# EAGLE board phasedetector (EAGLE 6.6.0)
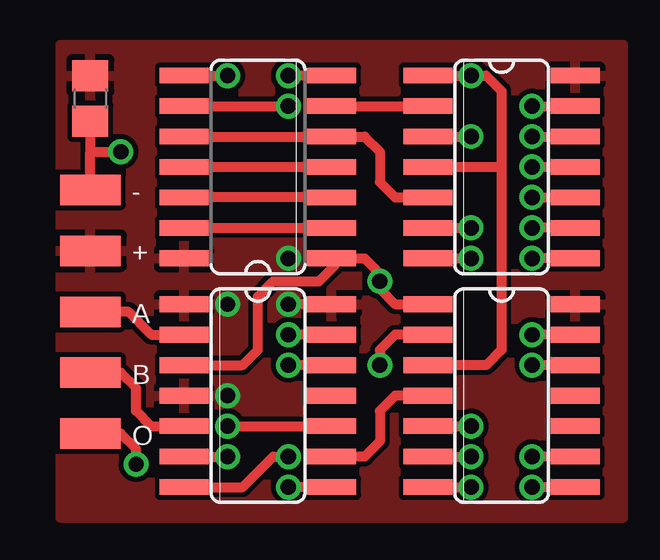
[diagram p0: board, top side]
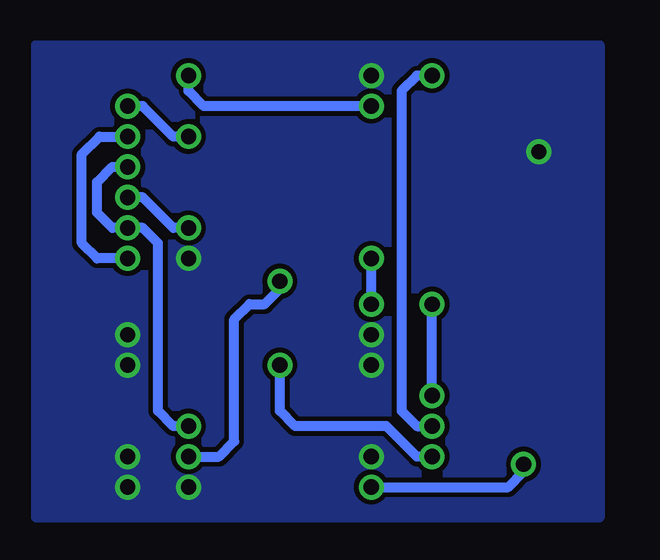
[diagram p1: board, bottom side, seen from below]

No outline drawn. Coordinates in mm, seen from the top.
Copper layers (1*16): Top 0.035mm / dielectric 1.5mm / Bottom 0.035mm
Design rules "default": minimum track width 10mil, minimum drill 24mil, track to track 8mil, track to pad 8mil, pad to pad 8mil, via to via 8mil, smd to smd 8mil, copper to edge 40mil, drill to drill 8mil, minimum pad ring 10mil, minimum via ring 8mil, stop-mask expansion 4mil, vias tented up to drill 0mil, thermal gap 10mil

## Footprints (pad centres in the part's own frame; a part is rotated, then mirrored left to right if it is on the bottom)
SMD1,27-2,54 = smd 1.27 x 2.54: 1 0,0
C0805 = smd 1.3 x 1.5: 1 -0.95,0; 2 0.95,0
SO14 = smd 0.66 x 2.032: 1 -3.81,-3.073; 2 -2.54,-3.073; 3 -1.27,-3.073; 4 0,-3.073; 5 1.27,-3.073; 6 2.54,-3.073; 7 3.81,-3.073; 8 3.81,3.073; 9 2.54,3.073; 10 1.27,3.073; 11 0,3.073; 12 -1.27,3.073; 13 -2.54,3.073; 14 -3.81,3.073

## Placement (x,y rotation side)
+  [SMD1,27-2,54]  1.27,11.11 270 top
-  [SMD1,27-2,54]  1.27,13.65 270 top
A  [SMD1,27-2,54]  1.27,8.57 270 top
B  [SMD1,27-2,54]  1.27,6.03 270 top
C1  1uF  [C0805]  1.27,17.46 270 top
IC1  74266  [SO14]  18.41,5.08 270 top
IC2  7400  [SO14]  18.41,14.61 270 top
IC3  7404  [SO14]  8.26,14.61 90 top
IC4  74126  [SO14]  8.26,5.08 270 top
O  [SMD1,27-2,54]  1.27,3.49 270 top

## Library data of the parts
+ - A B O = wirepad
C1 = rcl
IC1 IC2 IC4 = 74xx-us
IC3 = 74xx-eu

## Nets
GND: -.1 C1.2 IC1.7 IC1.8 IC1.9 IC1.12 IC1.13 IC2.7 IC3.7 IC4.7 IC4.12 IC4.13
N$1: IC1.5 IC2.9 IC2.11
N$2: IC2.8 IC2.12
N$3: IC1.3 IC2.1 IC2.4 IC3.9
N$4: IC2.6 IC2.10
N$5: IC2.3 IC2.13
N$6: IC3.2 IC3.13
N$7: IC3.3 IC3.12
N$8: IC3.4 IC3.11
N$9: IC2.5 IC3.5 IC3.10
N$10: IC2.2 IC3.6
N$11: IC1.4 IC4.9
N$12: IC1.1 IC1.6 IC3.1 IC4.3
N$13: A.1 IC4.2
N$14: IC3.8 IC4.10
N$15: IC4.8 O.1
N$16: B.1 IC4.5
N$17: IC1.2 IC4.6
VCC: +.1 C1.1 IC1.14 IC2.14 IC3.14 IC4.1 IC4.4 IC4.14

## Tracks (layer width: path | path; a pad name or v marks a point on that pad's centre or on a via)
GND  (via drill 0.64)
  Top 0.406: IC3.7 v9.53,18.41 | IC1.8 v19.68,1.27 | IC1.9 v19.68,2.54 | IC1.13 v19.68,7.62 | IC1.12 v19.68,6.35 | IC2.7 v17.14,10.79 | IC4.13 v9.53,7.62 | IC4.12 v9.53,6.35 | IC4.7 7.62,1.27 8.89,2.54 v9.53,2.54 | C1.2 1.27,15.24 | -.1 1.27,15.24 | 1.27,15.24 v2.54,15.24 | IC1.7 v17.14,1.27
  pour Bottom (isolate 0.203): 0,0 23.5,0 23.5,19.68 0,19.68
N$1  (via drill 0.64)
  Top 0.406: IC2.9 v19.68,12.06 | v19.68,14.61 IC2.11 | IC1.5 v17.14,3.81
  Bottom 0.406: v19.68,14.61 20.32,14.61 20.95,13.97 20.95,12.7 20.32,12.06 v19.68,12.06 19.05,12.06 18.41,11.43 18.41,4.45 17.78,3.81 v17.14,3.81
N$2  (via drill 0.64)
  Top 0.406: IC2.8 v19.68,10.79 | v19.68,15.88 IC2.12
  Bottom 0.406: v19.68,10.79 20.95,10.79 21.59,11.43 21.59,15.14 20.85,15.88 v19.68,15.88
N$3  (via drill 0.64)
  Top 0.406: 18.41,14.61 18.41,17.78 17.78,18.41 v17.14,18.41 IC2.1 | IC2.4 18.41,14.61 | 18.41,14.61 18.41,6.99 17.78,6.35 IC1.3 | IC3.9 v9.53,17.14
  Bottom 0.406: v9.53,17.14 16.51,17.14 17.14,17.78 v17.14,18.41
N$4  (via drill 0.64)
  Top 0.406: IC2.6 v17.14,12.06 | v19.68,13.34 IC2.10
  Bottom 0.406: v17.14,12.06 17.78,12.06 19.05,13.34 v19.68,13.34
N$5  (via drill 0.64)
  Top 0.406: IC2.3 v17.14,15.88 | v19.68,17.14 IC2.13
  Bottom 0.406: v17.14,15.88 17.78,15.88 19.05,17.14 v19.68,17.14
N$6
  Top 0.406: IC3.13 IC3.2
N$7
  Top 0.406: IC3.3 IC3.12
N$8
  Top 0.406: IC3.11 IC3.4
N$9
  Top 0.406: IC3.10 IC3.5 12.7,15.88 13.34,15.24 13.34,13.97 13.97,13.34 IC2.5
N$10
  Top 0.406: IC3.6 IC2.2
N$11
  Top 0.406: IC1.4 13.97,5.08 13.34,4.45 13.34,3.17 12.7,2.54 IC4.9
N$12  (via drill 0.64)
  Top 0.406: IC4.3 7.62,6.35 8.26,6.99 8.26,9.21 8.89,9.84 10.79,9.84 11.43,10.48 11.43,10.79 | 11.43,10.79 12.7,10.79 13.34,10.16 v13.34,9.84 13.34,9.53 13.97,8.89 IC1.1 | IC1.6 v17.14,2.54 | IC3.1 11.43,10.79
  Bottom 0.406: v17.14,2.54 15.88,2.54 15.24,3.17 15.24,8.26 14.61,8.89 13.97,8.89 13.34,9.53 v13.34,9.84
N$13
  Top 0.406: IC4.2 3.81,7.62 2.86,8.57 A.1
N$14  (via drill 0.64)
  Top 0.406: IC3.8 v6.99,18.41 | v6.99,3.81 IC4.10
  Bottom 0.406: v6.99,18.41 7.62,18.41 8.26,17.78 8.26,4.45 7.62,3.81 v6.99,3.81
N$15  (via drill 0.64)
  Top 0.406: IC4.8 v9.53,1.27 | v3.17,2.22 3.17,2.86 2.54,3.49 O.1
  Bottom 0.406: v9.53,1.27 3.81,1.27 3.17,1.91 v3.17,2.22
N$16
  Top 0.406: B.1 2.54,6.03 3.17,5.4 3.17,4.45 3.81,3.81 IC4.5
N$17  (via drill 0.64)
  Top 0.406: IC4.6 v6.99,2.54 | IC1.2 13.97,7.62 13.34,6.99 v13.34,6.35
  Bottom 0.406: v6.99,2.54 7.62,2.54 8.89,3.81 12.7,3.81 13.34,4.45 v13.34,6.35
VCC  (via drill 0.64)
  Top 0.406: IC4.14 v9.53,8.89
  Bottom 0.406: v6.99,5.08 v6.99,8.89 | v9.53,8.89 v9.53,10.79
  pour Top (isolate 0.203): 0,0 23.5,0 23.5,19.68 0,19.68